# Altium PCB PCB-MAKEY_MAKEY_PTITTEAM_v1.2.PcbDoc
Units mil, origin at the board's own origin, x right, y up, seen from the top; angles counter-clockwise.
Board outline 3500 x 1950 mil, 2 copper layers (Top Layer, Bottom Layer); 48 components, 59 nets, 150 pads, 14 vias.
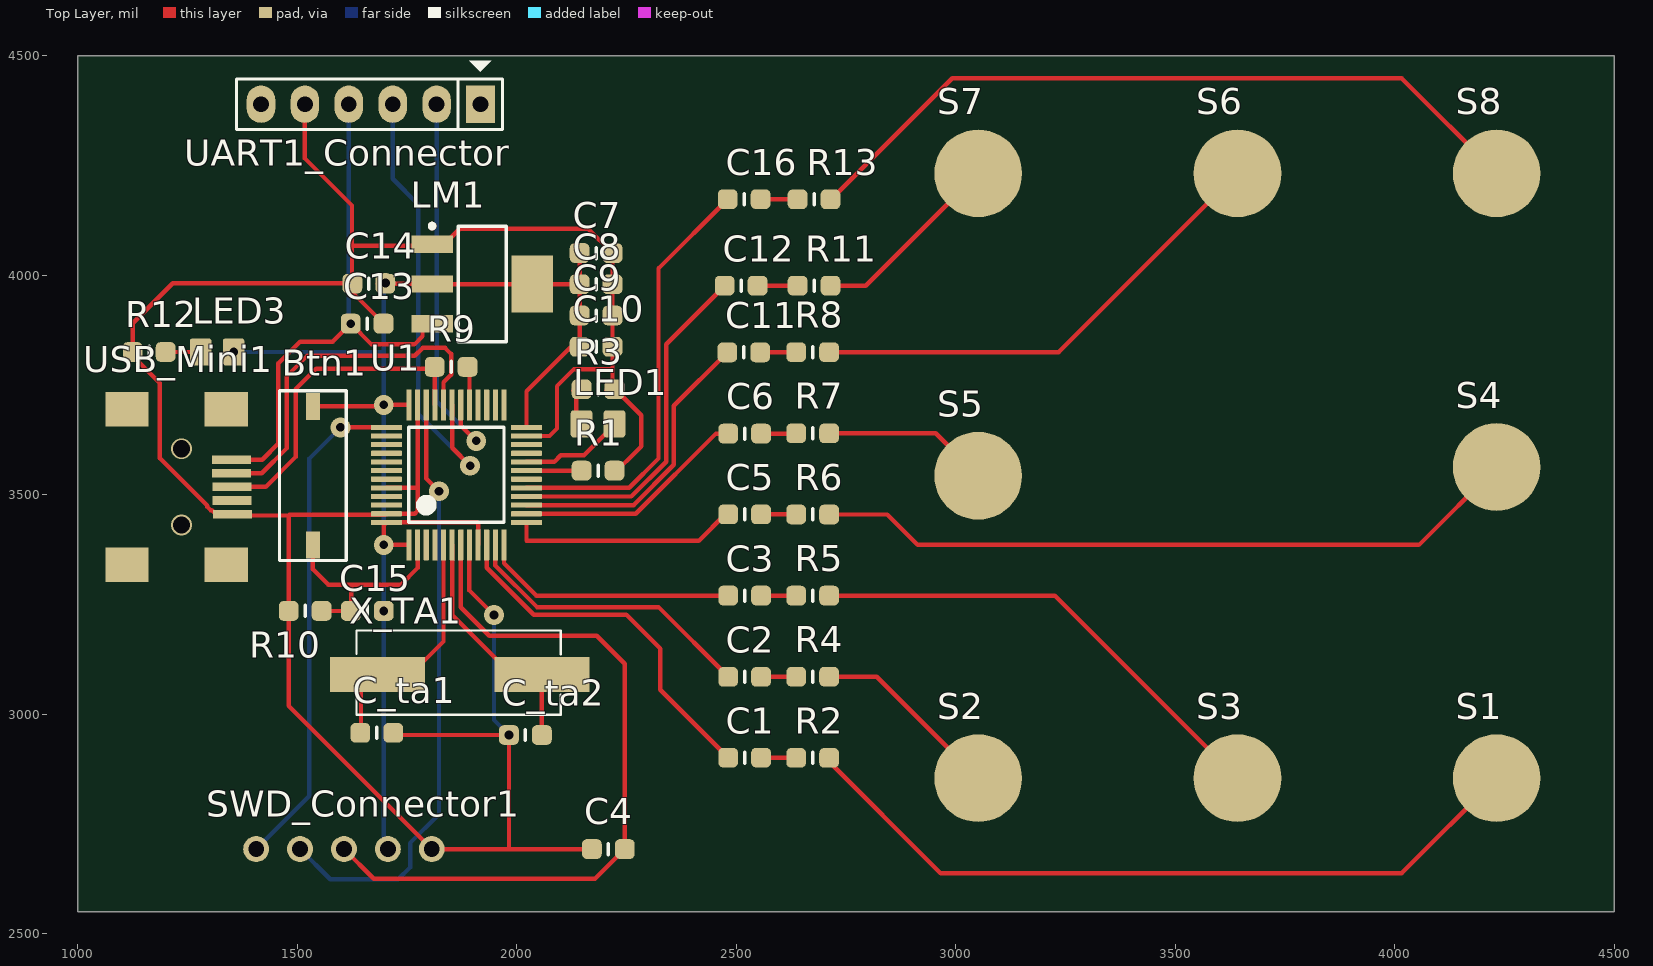
[diagram p0: Top Layer view]
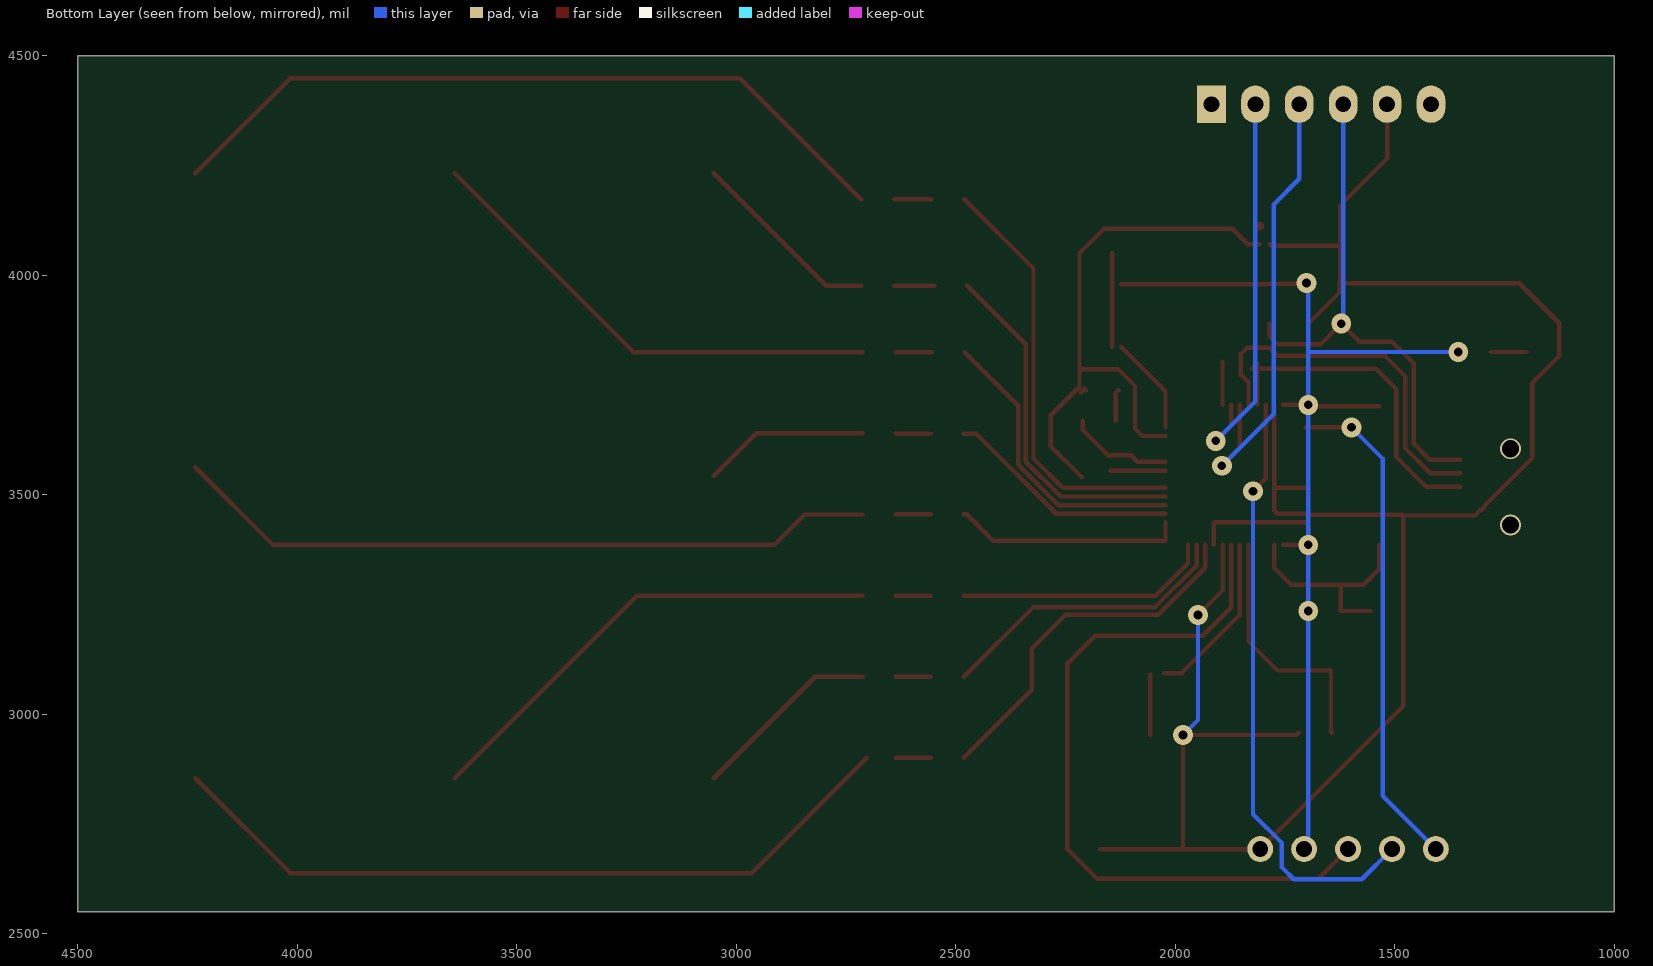
[diagram p1: Bottom Layer view, seen from below]

## Layer stack, top to bottom
Top Solder: solder mask 0.4, Solder Resist, Dk 3.5
Top Layer: signal copper 1.4
Dielectric1: dielectric 12.6, FR-4, Dk 4.8
Bottom Layer: signal copper 1.4
Bottom Solder: solder mask 0.4, Solder Resist, Dk 3.5

## Board outline
1000,4500 1000,2550 4500,2550 4500,4500 1000,4500

## Design rules (kind name [scope] priority, off if disabled: settings)
Clearance [All] p1: gap=10 except(7: Arc-Arc Arc-SMDPad Track-SMDPad SMDPad-SMDPad; 7.5: Arc-Track Track-Track)
PolygonConnect [All] p1: connectstyle=Relief reliefconductorwidth=10 reliefentries=4 polygonreliefangle="90 Angle" airgapwidth=10
RoutingVias [All] p1: holewidth=28 width=50 viastyle="Through Hole" minholewidth=28 minwidth=50 maxholewidth=28 maxwidth=50
SolderMaskExpansion [All] p1: expansion=4
Width [All] p1: maxlimit=10 minlimit=10 preferedwidth=10
30 further rules are at their usual default settings.

## Components (designator, comment, footprint, x,y, rotation, side; value= is the part's Value field where it differs from the comment)
Btn1 "Function" Button_SMD_2pin 1535.43,3543.31 r90 top
C1 "104" CAP-0603 2519,2901.05 r0 top
C2 "104" CAP-0603 2519,3085.37 r0 top
C3 "104" CAP-0603 2519,3270.37 r0 top
C4 "104" CAP-0603 2208.66,2692.91 r180 top
C5 "104" CAP-0603 2519,3455.37 r0 top
C6 "104" CAP-0603 2519,3639.37 r0 top
C7 "1uF" CAP-0603 2180.64,4050.63 r180 top
C8 "1uF" CAP-0603 2180.64,3979.49 r0 top
C9 "1uF" CAP-0603 2180.64,3908.36 r180 top
C10 "1uF" CAP-0603 2180.64,3837.23 r0 top
C11 "104" CAP-0603 2517,3824.37 r0 top
C12 "104" CAP-0603 2511,3976.37 r0 top
C13 "104" CAP-0603 1659,3890 r180 top
C14 "104" CAP-0603 1663,3981 r0 top
C15 "104" CAP-0603 1659.48,3235.35 r0 top
C16 "104" CAP-0603 2518,4173.37 r0 top
C_ta1 "22pF" CAP-0603 1681.13,2957.78 r0 top
C_ta2 "22pF" CAP-0603 2019.68,2952.76 r180 top
LED1 "color" LED-0805 2185.04,3661.42 r180 top
LED3 "color" LED-0805 1317.44,3825.35 r180 top
LM1 "LM1117" SOT223-4N 1921.26,3980.32 r0 top
R1 "0R" RES-0603 2185.04,3555.12 r180 top
R2 "0R" RES-0603 2673.99,2900.67 r0 top
R3 "1k2" RES-0603 2185.04,3740.16 r180 top
R4 "0R" RES-0603 2673.99,3085.49 r0 top
R5 "0R" RES-0603 2673.99,3270.32 r0 top
R6 "0R" RES-0603 2673.99,3455.14 r0 top
R7 "0R" RES-0603 2673.99,3639.96 r0 top
R8 "0R" RES-0603 2673.99,3824.79 r0 top
R9 "1k5" RES-0603 1850.39,3791.34 r0 top
R10 "10k" RES-0603 1517.75,3235.35 r0 top
R11 "0R" RES-0603 2677.17,3976.38 r0 top
R12 "1k2" RES-0603 1162.44,3825.35 r0 top
R13 "0R" RES-0603 2677.17,4173.23 r0 top
S1 "C_Sensor" SOP2 4232.28,2854.33 r0 top
S2 "C_Sensor" SOP2 3051.18,2854.33 r0 top
S3 "C_Sensor" SOP2 3641.73,2854.33 r0 top
S4 "C_Sensor" SOP2 4232.28,3562.99 r0 top
S5 "C_Sensor" SOP2 3051.18,3543.31 r0 top
S6 "C_Sensor" SOP2 3641.73,4232.28 r0 top
S7 "C_Sensor" SOP2 3051.18,4232.28 r0 top
S8 "C_Sensor" SOP2 4232.28,4232.28 r0 top
SWD_Connector1 "" JP_5 1606.3,2692.91 r0 top
U1 "STM32F103C8T6" LQFP48_N 1862.61,3545.31 r90 top
UART1_Connector "Connector" JP6 1917.32,4389.76 r180 top
USB_Mini1 "" Micro_USB 1350,3580 r270 top
X_TA1 "8Mhz" Xtal_SMD 1870.08,3090.55 r180 top

## Footprints (in the part's own frame and the unit in brackets; to place one, negate y for a bottom-side part, rotate by r counter-clockwise, add the part's x,y. Pads: shape width x height; smd on the part's side, far side on the other; paste and mask are expansions set on the pad)
Button_SMD_2pin [mm] "Button smd 2pin"
  rect 1.55x0.8 smd: 1(-4.013,0) 2(4.013,0)
  silkscreen extent -4.9,-1.93 4.93,1.93, body extent -4.05,-1.8 3.95,1.8, height 2.53
CAP-0603 [mil] "Chip Capacitor; Body 2 x 1.2 mm (LxW typ)"
  rrect50% 45x45 smd: 1(-37.5,0) 2(37.5,0)
  silkscreen extent 0,-12 0,12, body extent -39,-24 39,24, height 28
JP6 [mil] "JP6"
  rect 65x85 hole 36: 1(0,0)
  oval 65x85 hole 36: 2(100,0) 3(200,0) 4(300,0) 5(400,0) 6(500,0)
  silkscreen extent -50,-99 556,58, body extent -48,-50 548,48, height 323
JP_5 [mm]
  round 1.5 hole 0.914: 1(-5.08,0) 2(-2.54,0) 3(0,0) 4(2.54,0) 5(5.08,0)
  body extent -6.3,-1.36 6.3,1.14, height 8.22
LED-0805 [mil] "Chip LED; Body 2 x 1.2 mm (LxW typ)"
  rrect25% 49.27x61.77 smd: 1(-37.5,0) 2(37.5,0)
  body extent -39,-25 39,25, height 31
LQFP48_N [mm] "Thin QFP, 48-Leads, Body 7x7mm, Pitch 0.5mm, IPC Medium Density"
  rrect25% 1.8x0.297 smd: 1(-4.05,2.75) 2(-4.05,2.25) 3(-4.05,1.75) 4(-4.05,1.25) 5(-4.05,0.75) 6(-4.05,0.25) 7(-4.05,-0.25) 8(-4.05,-0.75) 9(-4.05,-1.25) 10(-4.05,-1.75) 11(-4.05,-2.25) 12(-4.05,-2.75) 25(4.05,-2.75) 26(4.05,-2.25) 27(4.05,-1.75) 28(4.05,-1.25) 29(4.05,-0.75) 30(4.05,-0.25) 31(4.05,0.25) 32(4.05,0.75) 33(4.05,1.25) 34(4.05,1.75) 35(4.05,2.25) 36(4.05,2.75)
  rrect25% 0.297x1.8 smd: 13(-2.75,-4.05) 14(-2.25,-4.05) 15(-1.75,-4.05) 16(-1.25,-4.05) 17(-0.75,-4.05) 18(-0.25,-4.05) 19(0.25,-4.05) 20(0.75,-4.05) 21(1.25,-4.05) 22(1.75,-4.05) 23(2.25,-4.05) 24(2.75,-4.05) 37(2.75,4.05) 38(2.25,4.05) 39(1.75,4.05) 40(1.25,4.05) 41(0.75,4.05) 42(0.25,4.05) 43(-0.25,4.05) 44(-0.75,4.05) 45(-1.25,4.05) 46(-1.75,4.05) 47(-2.25,4.05) 48(-2.75,4.05)
  silkscreen extent -2.75,-2.75 2.75,2.75, body extent -3.5,-3.5 3.5,3.5, height 1.6
Micro_USB [mm] "Micro usb connector"
  rect 2x2.5 smd: 0(-2.929,-6.045) 0(-2.925,-0.305) 0(6.071,-6.045) 0(6.075,-0.305)
  rect 0.5x2.25 smd: 1(0,0) 2(0.787,0.013) 3(1.575,0.025) 4(2.362,0.038) 5(3.15,0.051)
  body extent -3.78,-8.83 6.92,0.37, height 3.95
RES-0603 [mil] "Chip Resistor; Body 2 x 1.2 mm (LxW typ)"
  rrect50% 45x45 smd: 1(-37.5,0) 2(37.5,0)
  silkscreen extent 0,-12 0,12, body extent -39,-24 39,24, height 28
SOP2 [mil]
  round 200 smd: 1(0,0)
SOT223-4N [mm]
  rect 2.4x1 smd: 1(-2.9,2.3) 2(-2.9,0) 3(-2.9,-2.3)
  rect 2.4x3.3 smd: 4(2.9,0)
  Top Layer circle w0.25: c-2.9,3.35 r0.125
  silkscreen extent -3.02,-3.35 1.4,3.47, body extent -3.39,-3.27 3.5,3.23, height 1.72
Xtal_SMD [mm] "Crystal smd"
  rect 5.5x2 smd: 1(-4.75,0) 2(4.75,0)
  silkscreen extent -5.84,-2.54 5.97,2.32, body extent -6.3,-2.51 6.5,2.32, height 4.3

## Part data
Btn1: library part Button_SMD_2pin, "Switch button 2 pin"
C1 C2 C3 C4 C5 C6 C9 C10 C11 C13 C14 C15: library part CM, "Cap SMD"
C7 C8 C12 C16 C_ta1 C_ta2: library part CN0, "Cremic For Xtal 1pF => 100pF"
LED1 LED3: library part Led_SMD, "Led smd"
LM1: "3v3"
R1 R2 R3 R4 R5 R6 R7 R8 R10 R11 R12 R13: library part Res_SMD_0603, "Resistor smd 0603 type"
R9: library part R, "Resistor 1/4W"
SWD_Connector1: library part Load_Program
U1: "STM32 ARM-based 32-bit MCU with 64 Kbytes Flash, 48-pin LQFP, Industrial Temperature"
UART1_Connector: library part USB2Com_Conn, "Connector to USB2Com module"
USB_Mini1: library part USB_M
X_TA1: library part XT2, "Crystal For all Crystal 2pin."

## Via types
v1: diameter 45, hole 19.68, Top Layer to Bottom Layer, 12 vias
v2: diameter 47.24, hole 39.37, Top Layer to Bottom Layer, tented both sides, 2 vias

## Nets (pads, with @x,y where several pads share a name; then routed paths per layer and width w, separated by ;. In a path a pad name is that pad's centre, name@x,y a point inside that pad or via, vN(x,y) a via of type N, cw(c..) or ccw(c..) an arc to the next point about the centre after c; other vN are vias at no path point)
GND: C4.2 C7.1 C8.2 C9.1 C10.2 C13.1 C14.1 C_ta1.2 C_ta2.2 LM1.1 R1.1 R3.1 R10.1 R12.1 SWD_Connector1.5 U1.8 U1.23 U1.35 U1.44 U1.47 UART1_Connector.5 USB_Mini1.5 | length 6163
  Top Layer w10: UART1_Connector.5 1517.32,4266.14 1624.48,4158.98 1624.48,4067 ; C13.1 1625.5,3961 C14.1 C14.1@1624.48,3982.02 ; U1.44 1774,3515.78 ; C_ta1.2 1723.65,2952.76 v1(1982.18,2952.76) 1982.18,2694.98 1984.25,2692.91 ; U1.35 1774.03,3515.75 1774.03,3463.01 1767.75,3456.72 U1.47 1701.32,3454.88 1482.31,3454.88 1480.25,3452.82 ; LM1.1@1785.32,4071.22 1781.03,4066.93 1624.56,4066.93 1624.48,4067 ; LM1.1 1834.65,4070.87 1870.08,4106.3 2162.47,4106.3 C7.1 C8.2 C10.2 2218.14,3786 ; U1.8 1892.14,3281.86 v1@1941,3233 ; U1.23 2074.41,3633.89 2091.59,3651.07 2091.59,3747.59 2130.28,3786.28 2217.87,3786.28 2218.14,3786 ; C4.2 1984.25,2692.91 ; R3.1@2203.86,3738.56 2206.67,3741.36 R3.1@2215.21,3732.83 ; R1.1@2212.55,3539.32 2283.46,3610.24 2283.46,3681.1 2224.41,3740.16 R3.1 2218.14,3744.55 2218.14,3786 ; 1480.25,3452.82 1317.18,3452.82 1304.84,3465.16 1302.24,3465.16 1295.21,3472.19 1295.21,3474.79 1186.39,3583.61 1186.39,3754.56 1124.94,3816 R12.1 1124.94,3890.94 1216.02,3982.02 C14.1@1624.48,3982.02 ; 1480.25,3452.82 R10.1 1480.25,3018.96 SWD_Connector1.5 1984.25,2692.91 ; C14.1@1624.48,3982.02 1624.48,4067
  Bottom Layer w10: v1(1948,3226) 1948,2986.94 v1(1982.18,2952.76)
NetC1_2: C1.2 R2.1 | length 80.2
  Top Layer w10: C1.2 2636.12,2901.05 R2.1
NetC2_2: C2.2 R4.1 | length 80
  Top Layer w10: C2.2 2636.37,3085.37 R4.1
NetC3_2: C3.2 R5.1 | length 80
  Top Layer w10: C3.2 2636.44,3270.37 R5.1
NetC5_2: C5.2 R6.1 | length 80.1
  Top Layer w10: C5.2 2636.27,3455.37 R6.1
NetC6_2: C6.2 R7.1 | length 80.2
  Top Layer w10: C6.2 2635.9,3639.37 R7.1
NetC11_2: C11.2 R8.1 | length 82.2
  Top Layer w10: C11.2 2636.08,3824.37 R8.1
NetC12_2: C12.2 R11.1 | length 91.2
  Top Layer w10: C12.2 R11.1
NetC16_2: C16.2 R13.1 | length 84.2
  Top Layer w10: C16.2 2639.52,4173.37 R13.1
NetLED1_2: LED1.2 R3.2 | length 72.5
  Top Layer w10: R3.2@2128.86,3738.56 2135.41,3732.01 LED1.2@2135.41,3668.74
NetLED3_2: LED3.2 R12.2 | length 80
  Top Layer w10: R12.2 LED3.2
NetR2_2: R2.2 S1.1 | length 1728.3
  Top Layer w10: R2.2@2702.54,2900.67 2965.42,2637.8 4015.75,2637.8 S1.1
NetR4_2: R4.2 S2.1 | length 435.4
  Top Layer w10: R4.2 2820.02,3085.49 S2.1
NetR5_2: R5.2 S3.1 | length 1102.5
  Top Layer w10: R5.2 3225.75,3270.32 S3.1
NetR6_2: R6.2 S4.1 | length 1622.9
  Top Layer w10: R6.2 2844.07,3455.14 2913.39,3385.83 4055.12,3385.83 S4.1
NetR7_2: R7.2 S5.1 | length 379.7
  Top Layer w10: R7.2 2954.52,3639.96 S5.1
NetR8_2: R8.2 S6.1 | length 1099
  Top Layer w10: R8.2 3234.24,3824.79 S6.1
NetR11_2: R11.2 S7.1 | length 442.5
  Top Layer w10: R11.2 2795.28,3976.38 S7.1
NetR13_2: R13.2 S8.1 | length 1721.5
  Top Layer w10: R13.2 2716.54,4173.23 2992.13,4448.82 4015.75,4448.82 S8.1
NRST: C4.1 SWD_Connector1.3 U1.7 | length 1687.2
  Top Layer w10: SWD_Connector1.3 1674.21,2625 2178.25,2625 C4.1 2246.16,3114.84 2182,3179 1937.28,3179 1872.46,3243.83 U1.7
OSC_IN: C_ta1.1 U1.5 X_TA1.2 | length 578
  Top Layer w10: C_ta1.1 1644.99,2959.13 1644.99,3099.62 1766.94,3099.62 1833.09,3165.76 U1.5
OSC_OUT: C_ta2.1 U1.6 X_TA1.1 | length 524.4
  Top Layer w10: U1.6 1852.77,3225.97 1984.98,3093.76 X_TA1.1@2024.86,3093.76 ; C_ta2.1@2057.09,2952.85 X_TA1.1
PA0: C1.1 U1.10 | length 836.2
  Top Layer w10: U1.10 1931.51,3333.95 2038.87,3226.59 2249.78,3226.59 2326.77,3149.61 2326.77,3055.78 C1.1
PA1: C2.1 U1.11 | length 682.2
  Top Layer w10: U1.11 1951.2,3339.01 2046.12,3244.09 2322.78,3244.09 C2.1
PA2: C3.1 U1.12 | length 582.9
  Top Layer w10: U1.12 1970.88,3344.08 2044.59,3270.37 C3.1
PA3: C5.1 U1.13 | length 526.1
  Top Layer w10: U1.13 2022.06,3395.26 2414.94,3395.26 2475.06,3455.37 C5.1
PA4: C6.1 U1.14 | length 535.1
  Top Layer w10: U1.14 2271.13,3456.72 2453.77,3639.37 C6.1
PA5: C11.1 U1.15 | length 680.4
  Top Layer w10: U1.15 2266.06,3476.41 2357.83,3568.18 2357.83,3702.7 C11.1
PA6: C12.1 U1.16 | length 807.2
  Top Layer w10: U1.16 2261,3496.09 2340.33,3575.43 2340.33,3843.2 C12.1
PA7: C16.1 U1.17 | length 984.5
  Top Layer w10: U1.17 2255.94,3515.78 2322.83,3582.68 2322.83,4015.7 C16.1
PA13: SWD_Connector1.2 U1.34 | length 1383.5
  Top Layer w10: U1.34 1793.72,3536.99 v1(1822.83,3507.87)
  Bottom Layer w10: SWD_Connector1.2 1575.21,2624 1730,2624 1757,2651 1757,2706.59 1822.83,2772.42 v1(1822.83,3507.87)
PA14: SWD_Connector1.1 U1.37 | length 1145
  Top Layer w10: v1@1598.46,3653.57 U1.37
  Bottom Layer w10: SWD_Connector1.1 1527.56,2814.17 1527.56,3582.68 v1(1598.43,3653.54)
PA15: U1.38
PB0: U1.18
PB1: R1.2 U1.19 | length 125.5
  Top Layer w10: U1.19 R1.2
PB2: LED1.1 U1.20 | length 239.7
  Top Layer w10: U1.20 2085.11,3574.83 2100.38,3590.11 2153.1,3590.11 2210.41,3647.41 LED1.1@2210.41,3668.74
PB3: U1.39
PB4: U1.40
PB5: U1.41
PB6: U1.42
PB7: U1.43
PB8: U1.45
PB9: U1.46
PB10: U1.21
PB11: U1.22
PB12: U1.25
PB13: U1.26
PB14: U1.27
PB15: U1.28
PC13: Btn1.1 C15.1 R10.2 U1.2 | length 503.4
  Top Layer w10: Btn1.1 1535.43,3330.71 1570.87,3295.28 1623,3295.28 ; R10.2 C15.1 1623,3236.37 1623,3295.28 ; U1.2 1774.03,3333.09 1736.22,3295.28 1623,3295.28
PC14: U1.3
PC15: U1.4
USART1_RX: U1.31 UART1_Connector.3 | length 1052
  Top Layer w10: U1.31 1852.77,3607.04 v1(1893.6,3566.21)
  Bottom Layer w10: UART1_Connector.3 1717.32,4219.69 1775.59,4161.42 1775.59,3684.22 v1(1893.6,3566.21)
USART1_TX: U1.30 UART1_Connector.2 | length 901
  Top Layer w10: U1.30 1872.46,3658.07 v1(1907.74,3622.78)
  Bottom Layer w10: UART1_Connector.2 1817.32,3713.2 v1(1907.74,3622.78)
USB_5V: C13.2 LM1.3 UART1_Connector.4 USB_Mini1.1 | length 1206.8
  Top Layer w10: USB_Mini1.1 1420,3580 1456.69,3616.69 1456.69,3799.21 1506.48,3849 1580.5,3849 v1(1621.5,3890) 1668.98,3842.52 1766.85,3842.52 1785.32,3860.98 LM1.3@1785.32,3890.12
  Bottom Layer w10: v1@1617.32,3910.05 UART1_Connector.4
USB_DISC: R9.2 U1.29 | length 98.4
  Top Layer w10: U1.29 1892.21,3704.82 R9.2@1892.21,3803.09
USBDM: U1.32 USB_Mini1.2 | length 843.5
  Top Layer w10: USB_Mini1.2 1419,3549 1476.38,3606.38 1476.38,3770.38 1523.03,3817.03 1550.97,3817.03 1551.28,3816.71 1767.72,3816.71 1785.65,3834.65 1836.65,3834.65 1850.39,3820.9 1850.39,3773.46 1833.09,3756.15 U1.32
USBDP: R9.1 U1.33 USB_Mini1.3 | length 787.5
  Top Layer w10: USB_Mini1.3 1428,3518 1496.06,3586.06 1496.06,3740.16 1543.31,3787.4 1825.29,3787.4 1813.4,3799.29 U1.33
VCC: Btn1.2 C7.2 C8.1 C9.2 C10.1 C14.2 C15.2 LED3.1 LM1.2 LM1.4 SWD_Connector1.4 U1.1 U1.9 U1.24 U1.36 U1.48 | length 3107.2
  Top Layer w10: Btn1.2 1693.43,3701.31 v1(1696.85,3704.72) U1.36@1754.32,3704.72 ; C14.2@1683.3,3980.67 1785.32,3980.67 1786.49,3979.49 C8.1@2123.46,3979.49 ; U1.1@1754.32,3385.83 v1(1696.85,3385.83) 1696.85,3430.72 U1.48 1754.07,3437.04 1754.35,3436.76 1754.35,3437.04 1909.64,3437.04 1911.83,3434.85 U1.9 ; U1.24 2022.06,3735.83 C10.1@2123.46,3837.23 ; C10.1 C9.2 C8.1 C7.2
  Bottom Layer w10: v1(1354.94,3825.35) 1696.85,3825.35 ; v1(1700.79,3982.38) 1696.85,3978.44 1696.85,3825.35 ; SWD_Connector1.4 1696.85,2702.36 v1(1696.85,3385.83) v1(1696.85,3704.72) 1696.85,3825.35
  other v1: 1696.98,3235.35
pads on no net: UART1_Connector.1 UART1_Connector.6 USB_Mini1.0 USB_Mini1.4
copper on no net:
  other v2: 1236.43,3431.39 1236.43,3604.61

## Silkscreen, mask and mechanical layers (free items; w line width, h text height)
Mechanical 13:
  lines w10: 1000,3525 1075,3525 4500,3525